# Altium PCB MSP IOboard.PcbDoc
Units mm, origin at the board's own origin, x right, y up, seen from the top; angles counter-clockwise.
Board outline 152.4 x 101.6 mm, 2 copper layers (Top Layer, Bottom Layer); 51 components, 51 nets, 181 pads, 0 vias.
Unrouted connection lines stored in the file: 126.
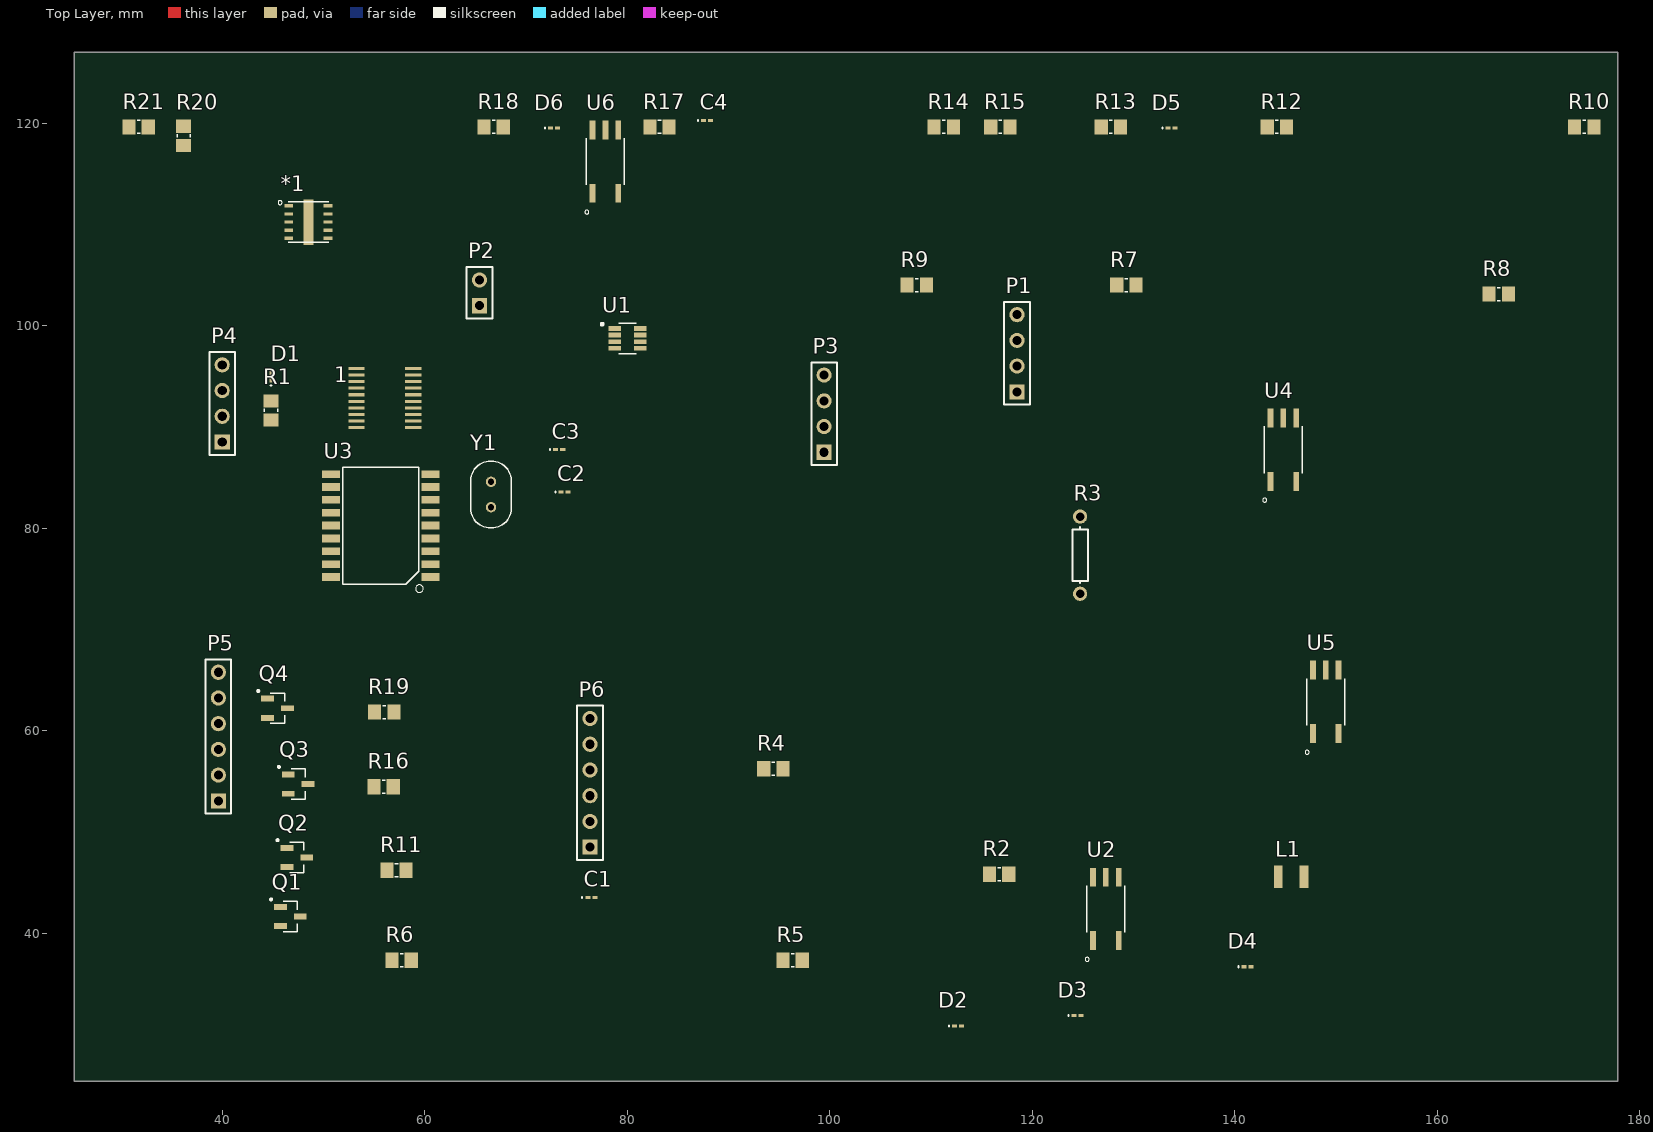
[diagram p0: Top Layer view]
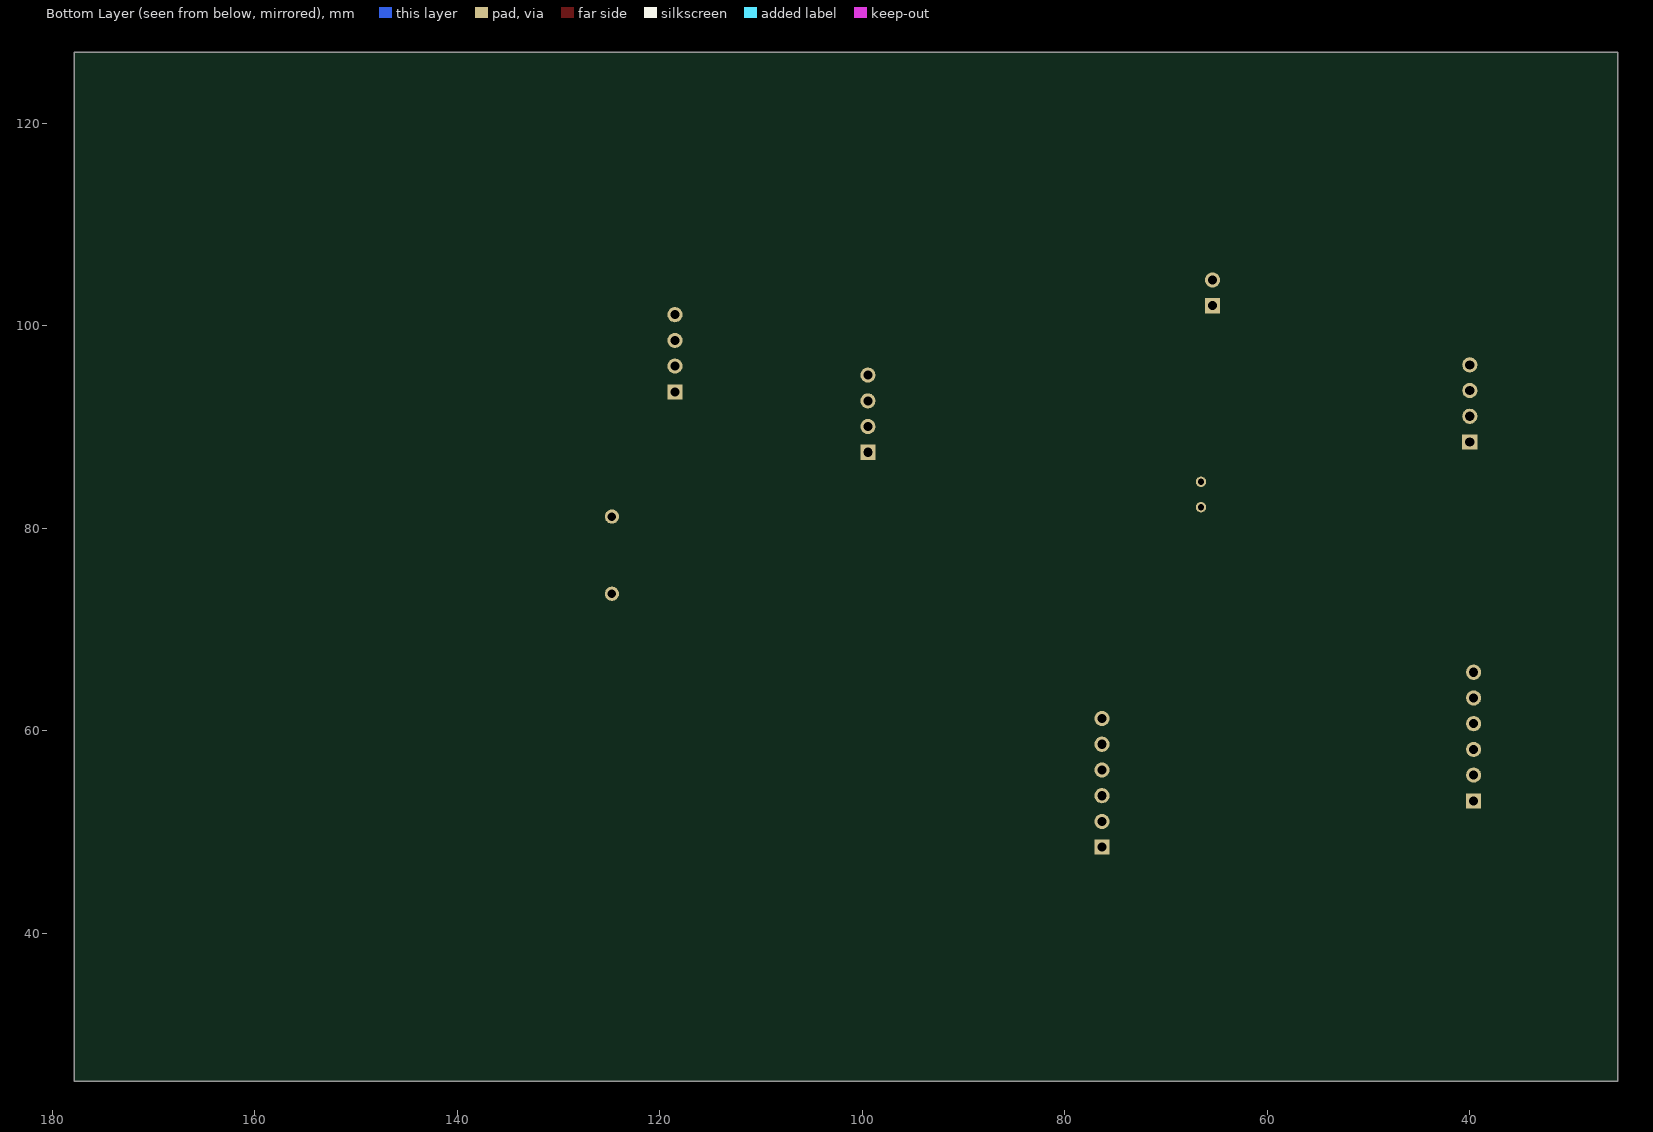
[diagram p1: Bottom Layer view, seen from below]

## Layer stack, top to bottom
Top Solder: solder mask 0.0102, Solder Resist, Dk 3.5
Top Layer: signal copper 0.0356
Dielectric 1: dielectric 0.32, FR-4, Dk 4.8
Bottom Layer: signal copper 0.0356
Bottom Solder: solder mask 0.0102, Solder Resist, Dk 3.5

## Board outline
25.4,25.4 177.8,25.4 177.8,127 25.4,127

## Design rules (kind name [scope] priority, off if disabled: settings)
Clearance [All] p1: gap=0.254 ignorepadtopadclearanceinfootprint=FALSE except(0: Arc-Hole Track-Hole SMDPad-Hole THPad-Hole Via-Hole Fill-Hole Poly-Hole Region-Hole Text-Hole)
PolygonConnect [All] p1: connectstyle=Relief reliefconductorwidth=0.254 reliefentries=4 polygonreliefangle="90 Angle" airgapwidth=0.254
RoutingVias [All] p1: holewidth=0.711 width=1.27 viastyle="Through Hole" minholewidth=0.711 minwidth=1.27 maxholewidth=0.711 maxwidth=1.27
SolderMaskExpansion [All] p1: expansion=0.102
Width [All] p1: maxlimit=0.254 minlimit=0.254 preferedwidth=0.254
30 further rules are at their usual default settings.

## Components (designator, comment, footprint, x,y, rotation, side; value= is the part's Value field where it differs from the comment)
1 "MSP430G2553IPW20" TSSOP-20 56.007,92.964 r0 top
*1 "TPS62177" SON80P400X400X80-10N 48.514,110.236 r0 top
C1 "Cap" 0603 76.454,43.561 r0 top value=22uF
C2 "Cap" 0603 73.818,83.566 r0 top value=22pF
C3 "Cap" 0603 73.279,87.757 r0 top value=22pF
C4 "Cap" 0603 87.884,120.269 r0 top value=2200pF
D1 "LED0" 0603 44.831,94.996 r90 top
D2 "LED0" 0603 112.66,30.861 r0 top
D3 "LED0" 0603 124.46,31.877 r0 top
D4 "LED0" 0603 141.235,36.703 r0 top
D5 "LED0" 0603 133.731,119.507 r0 top
D6 "LED0" 0603 72.771,119.507 r0 top
L1 "Inductor" INDC2520X18N 145.542,45.593 r0 top value=10uH
P1 "Programming Header" HDR1X4 118.491,93.472 r90 top
P2 "Reset Pins" HDR1X2 65.405,101.981 r90 top
P3 "Header 4" HDR1X4 99.441,87.503 r90 top
P4 "Header 4" HDR1X4 40.005,88.519 r90 top
P5 "Header 6" HDR1X6 39.624,53.086 r90 top
P6 "Header 6" HDR1X6 76.327,48.514 r90 top
Q1 "MOSFET-N" SOT95P230X110-3N 46.736,41.656 r0 top
Q2 "MOSFET-N" SOT95P230X110-3N 47.371,47.498 r0 top
Q3 "MOSFET-N" SOT95P230X110-3N 47.498,54.737 r0 top
Q4 "MOSFET-N" SOT95P230X110-3N 45.466,62.23 r0 top
R1 "Res1" RESC2012X70 44.831,91.633 r90 top value=500
R2 "Res1" RESC2012X70 116.713,45.847 r0 top value=500
R3 "Res1" AXIAL-0.3 124.714,77.343 r270 top value=120
R4 "Res1" RESC2012X70 94.427,56.261 r0 top value=100K
R5 "Res1" RESC2012X70 96.332,37.338 r0 top value=500
R6 "Res1" RESC2012X70 57.719,37.338 r180 top value=10k
R7 "Res1" RESC2012X70 129.286,104.013 r0 top value=10k
R8 "Res1" RESC2012X70 166.055,103.124 r0 top value=500
R9 "Res1" RESC2012X70 108.585,104.013 r0 top value=500
R10 "Res1" RESC2012X70 174.498,119.634 r0 top value=500
R11 "Res1" RESC2012X70 57.216,46.228 r180 top value=10k
R12 "Res1" RESC2012X70 144.145,119.634 r0 top value=500
R13 "Res1" RESC2012X70 127.762,119.634 r0 top value=500
R14 "Res1" RESC2012X70 111.252,119.634 r0 top value=47k
R15 "Res1" RESC2012X70 116.84,119.634 r0 top value=100
R16 "Res1" RESC2012X70 55.946,54.483 r180 top value=10k
R17 "Res1" RESC2012X70 83.185,119.634 r0 top value=500
R18 "Res1" RESC2012X70 66.802,119.634 r0 top value=500
R19 "Res1" RESC2012X70 56.007,61.849 r180 top value=10k
R20 "Res1" RESC2012X70 36.195,118.745 r90 top value=100
R21 "Res1" RESC2012X70 31.75,119.634 r0 top value=100
U1 "TCAN332GDCNR" SOT65P280X145-8N 80.025,98.75 r0 top
U2 "TLP152" SOIC127P375X700X220-5N 127.254,42.418 r90 top
U3 "MCP2515T-I/SO(SOIC18)" SOIC18-1.27-11.5X7.5MM 55.664,80.264 r90 top
U4 "TLP152" SOIC127P375X700X220-5N 144.78,87.757 r90 top
U5 "TLP152" SOIC127P375X700X220-5N 148.971,62.865 r90 top
U6 "TLP152" SOIC127P375X700X220-5N 77.851,116.205 r90 top
Y1 "ECS-160-20-46X" XTAL_ECS-160-20-46X 66.548,83.332 r90 top

## Footprints (in the part's own frame and the unit in brackets; to place one, negate y for a bottom-side part, rotate by r counter-clockwise, add the part's x,y. Pads: shape width x height; smd on the part's side, far side on the other; paste and mask are expansions set on the pad)
0603 [mm] "Chip Inductor, Body 0.6x0.3mm, IPC High Density"
  rect 0.5x0.3 smd: 1(-0.35,0) 2(0.35,0)
  silkscreen extent -0.9,-0.05 -0.9,0.05, body extent -0.33,-0.18 0.33,0.18, height 0.55
AXIAL-0.3 [mm] "Axial Device, Thru-Hole; 2 Leads; 0.3 in Pin Spacing"
  round 1.4 hole 0.85: 1(-3.81,0) 2(3.81,0)
  silkscreen extent -2.77,-0.76 2.77,0.76
HDR1X2 [mm] "Connector; Header; 2 Position"
  rect 1.5x1.5 hole 0.9: 1(0,0)
  round 1.5 hole 0.9: 2(2.54,0)
  silkscreen extent -1.27,-1.27 3.81,1.27
HDR1X4 [mm] "Connector; Header; 4 Position"
  rect 1.5x1.5 hole 0.9: 1(0,0)
  round 1.5 hole 0.9: 2(2.54,0) 3(5.08,0) 4(7.62,0)
  silkscreen extent -1.27,-1.27 8.89,1.27
HDR1X6 [mm] "Connector; Header; 6 Position"
  rect 1.5x1.5 hole 0.9: 1(0,0)
  round 1.5 hole 0.9: 2(2.54,0) 3(5.08,0) 4(7.62,0) 5(10.16,0) 6(12.7,0)
  silkscreen extent -1.27,-1.27 13.97,1.27
INDC2520X18N [mil]
  rect 34x87 smd: 1(-50,0) 2(50,0)
RESC2012X70 [mm]
  rect 1.3x1.5 smd: 1(-0.95,0) 2(0.95,0)
  silkscreen extent -0.15,-0.65 0.15,0.65
SOIC18-1.27-11.5X7.5MM [mil]
  rect 30x70 smd: 1(-200,-193.5) 2(-150,-193.5) 3(-100,-193.5) 4(-50,-193.5) 5(0,-193.5) 6(50,-193.5) 7(100,-193.5) 8(150,-193.5) 9(200,-193.5) 10(200,193.5) 11(150,193.5) 12(100,193.5) 13(50,193.5) 14(0,193.5) 15(-50,193.5) 16(-100,193.5) 17(-150,193.5) 18(-200,193.5)
  silkscreen extent -260,-165 227,148
SOIC127P375X700X220-5N [mm]
  rect 1.85x0.57 smd: 1(-3.13,1.27) 3(-3.13,-1.27) 4(3.13,-1.27) 5(3.13,0) 6(3.13,1.27)
  silkscreen extent -5.18,-1.88 2.3,2.04
SON80P400X400X80-10N [mm]
  rect 0.86x0.32 smd: 1(-1.935,1.6) 2(-1.935,0.8) 3(-1.935,0) 4(-1.935,-0.8) 5(-1.935,-1.6) 6(1.935,-1.6) 7(1.935,-0.8) 8(1.935,0) 9(1.935,0.8) 10(1.935,1.6)
  rect 1x4.5 smd: 11(0,0)
  silkscreen extent -2.99,-2 2,2.12
SOT65P280X145-8N [mm]
  rect 1.21x0.48 smd: 1(-1.255,0.975) 2(-1.255,0.325) 3(-1.255,-0.325) 4(-1.255,-0.975) 5(1.255,-0.975) 6(1.255,-0.325) 7(1.255,0.325) 8(1.255,0.975)
  silkscreen extent -2.62,-1.5 0.88,1.52
SOT95P230X110-3N [mm]
  rect 1.26x0.59 smd: 1(-0.98,0.95) 2(-0.98,-0.95) 3(0.98,0)
  silkscreen extent -2,-1.5 0.7,1.8
TSSOP-20 [mm]
  rect 1.6x0.3 smd: 1(-2.748,2.822) 2(-2.748,2.172) 3(-2.748,1.522) 4(-2.748,0.872) 5(-2.748,0.222) 6(-2.748,-0.428) 7(-2.748,-1.078) 8(-2.748,-1.728) 9(-2.748,-2.378) 10(-2.748,-3.028) 11(2.852,-3.028) 12(2.852,-2.378) 13(2.852,-1.728) 14(2.852,-1.078) 15(2.852,-0.428) 16(2.852,0.222) 17(2.852,0.872) 18(2.852,1.522) 19(2.852,2.172) 20(2.852,2.822)
XTAL_ECS-160-20-46X [mm]
  round 1.03 hole 0.63: 1(-1.25,0) 2(1.25,0)
  silkscreen extent -3.3,-2 3.3,2

## Part data
1: "MSP430G2x53, MSP430G2x13 Mixed Signal Microcontroller 20-TSSOP -40 to 85", Package="TSSOP-20 Texas Instruments", Availability=Unavailable, MF="Texas Instruments", MP=MSP430G2553IPW20, Price=None, SnapEDA_Link=https://www.snapeda.com/parts/MSP430G2553IPW20/Texas%20Instruments/view-part/?ref=snap
C1 C2 C3 C4: "Capacitor", LatestRevisionDate=17-Jul-2002, LatestRevisionNote="Re-released for DXP Platform.", PackageDescription="Radial Cap, Thru-Hole; 2 Leads; 0.3 in Pin Spacing", PackageReference=RAD-0.3, Published=8-Jun-2000, Publisher="Altium Limited"
D1 D2 D3 D4 D5 D6: "Typical INFRARED GaAs LED", LatestRevisionDate=08-Jul-2005, LatestRevisionNote="Mech Layer 1 removed.", PackageDescription="LED; 2 Leads", PackageReference=LED-0, Published=8-Jun-2000, Publisher="Altium Limited"
P1: library part "Header 4", "Header, 4-Pin", LatestRevisionDate=17-Jul-2002, LatestRevisionNote="Re-released for DXP Platform.", Publisher="Altium Limited"
P2: library part "Header 2", "Header, 2-Pin", LatestRevisionDate=17-Jul-2002, LatestRevisionNote="Re-released for DXP Platform.", Publisher="Altium Limited"
P3 P4: "Header, 4-Pin", LatestRevisionDate=17-Jul-2002, LatestRevisionNote="Re-released for DXP Platform.", Publisher="Altium Limited"
P5 P6: "Header, 6-Pin", LatestRevisionDate=17-Jul-2002, LatestRevisionNote="Re-released for DXP Platform.", Publisher="Altium Limited"
Q1 Q2 Q3 Q4: "N-Channel MOSFET", LatestRevisionDate=17-Jul-2002, LatestRevisionNote="Re-released for DXP Platform.", PackageDescription="TO, Flat Index; 3 In-Line, Axial Leads; Body Dia. 4.6mm; Lead Dia. 0.5 mm (max)", PackageReference=E3, PackageVersion=1995/1996, Published=8-Jun-2000, Publisher="Altium Limited"
R1 R2 R3 R4 R5 R6 R7 R8 R9 R10 R11 R12 R13 R14 R15 R16 R17 R18 R19 R20 R21: "Resistor", LatestRevisionDate=17-Jul-2002, LatestRevisionNote="Re-released for DXP Platform.", PackageDescription="Axial Device, Thru-Hole; 2 Leads; 0.3 in Pin Spacing", PackageReference=AXIAL-0.3, Published=8-Jun-2000, Publisher="Altium Limited"
U1: "3.3-V CAN Transceivers with CAN FD _Flexible Data Rate_ 8-SOT-23 -40 to 125", Package="SOT-23 Texas Instruments", Availability=Unavailable, MF="Texas Instruments", MP=TCAN332GDCNR, Price=None, SnapEDA_Link=https://www.snapeda.com/parts/TCAN332GDCNR/Texas%20Instruments/view-part/?ref=snap
U2 U4 U5 U6: "Optocoupler, Gate Driver, 3.75kv, Smdip", Package="SOIC-5 Toshiba", Availability=Unavailable, MF=Toshiba, MP=TLP152, Price=None, SnapEDA_Link=https://www.snapeda.com/parts/TLP152/Toshiba/view-part/?ref=snap
U3: library part INTERFACE-MCP2515T-I/SO(SOIC18), "MCP2515 Series 5.5 V 1 Mb/s Stand Alone SPI Interface CAN Controller- SOIC-18", Package="SOIC-18 Microchip", Availability=Unavailable, MF=Microchip, MP=MCP2515T-I/SO, Price=None, SnapEDA_Link=https://www.snapeda.com/parts/MCP2515T-I/SO/Microchip/view-part/?ref=snap
Y1: "Crystal 16MHz ±30ppm _Tol_ ±50ppm _Stability_ 20pF FUND 50Ohm", Package="HC46/X ECS International", Availability=Unavailable, MF="ECS Inc.", MP=ECS-160-20-46X, Price=None, SnapEDA_Link=https://www.snapeda.com/parts/ECS-160-20-46X/ECS%20Inc./view-part/?ref=snap
L1: Code_IEC=1005, Code_JEITA=0402, LatestRevisionDate=29-May-2009, LatestRevisionNote="IPC-7351 Footprint Added.", PackageDescription="Chip Inductor", PackageReference=0402-A, Published=8-Jun-2000, Publisher="Altium Limited"

## Nets (pads, with @x,y where several pads share a name; then routed paths per layer and width w, separated by ;. In a path a pad name is that pad's centre, name@x,y a point inside that pad or via, vN(x,y) a via of type N, cw(c..) or ccw(c..) an arc to the next point about the centre after c; other vN are vias at no path point)
3V3: 1.1 *1.3 *1.7 C1.2 D2.1 L1.2 P1.4 P6.5 P6.6 R4.1 R7.2 R14.1 U1.3 U3.18
4.75-28V: *1.1 *1.2 P3.4 P4.4 P5.6 Q1.3 Q2.3 Q3.3 Q4.3 U2.6 U4.6 U5.6 U6.6
CANH: P3.1 P4.1 R3.2 U1.7
CANL: P3.2 P4.2 R3.1 U1.6
FET1: 1.9 R1.1 R2.2 R17.2 R18.1
FET2: 1.10 R8.1 R9.1
FET3: 1.11 R12.2 R13.1
FET4: 1.12
GND: 1.20 *1.4 *1.5 *1.9 *1.10 C1.1 C2.1 C3.1 C4.1 D1.2 D3.2 D4.2 D5.2 D6.2 P1.1 P2.2 P3.3 P4.3 P5.5 P6.3 P6.4 R5.2 R6.1 R11.1 R16.1 R19.1 U1.2 U2.3 U2.4 U3.9 U4.3 U4.4 U5.3 U5.4 U6.3 U6.4
MCP_CS: 1.13 U3.16
MCP_INT: 1.6 R10.2 U3.12
MCP_MISO: 1.14 U3.15
MCP_MOSI: 1.15 U3.14
MCP_RX0: 1.5 U3.11
MCP_RX1: 1.2 U3.10
MCP_SCLK: 1.7 U3.13
MCP_TX0: 1.8 U3.4
MCP_TX1: 1.18 U3.5
MCP_TX2: 1.19 U3.6
Net*1_6: *1.6 L1.1
Net*1_8: *1.8 R4.2
NetC2_2: C2.2 U3.7 Y1.1
NetC3_2: C3.2 U3.8 Y1.2
NetC4_2: C4.2 P2.1 R15.2
NetD1_1: D1.1 R1.2
NetD2_2: D2.2 R5.1
NetD3_1: D3.1 R8.2
NetD4_1: D4.1 R10.1
NetD5_1: D5.1 R12.1
NetD6_1: D6.1 R17.1
NetP6_1: P6.1 R21.2
NetP6_2: P6.2 R20.2
NetQ1_2: Q1.2 R6.2 U2.5
NetQ2_2: Q2.2 R11.2 U4.5
NetQ3_2: Q3.2 R16.2 U5.5
NetQ4_2: Q4.2 R19.2 U6.5
NetR2_1: R2.1 U2.1
NetR7_1: R7.1 U3.17
NetR9_2: R9.2 U4.1
NetR13_2: R13.2 U5.1
NetR18_2: R18.2 U6.1
NetU1_1: U1.1 U3.1
NetU1_4: U1.4 U3.2
P1.1: 1.3 R21.1
P1.2: 1.4 R20.1
PWROUT1: P5.1 Q1.1
PWROUT2: P5.2 Q2.1
PWROUT3: P5.3 Q3.1
PWROUT4: P5.4 Q4.1
RST: 1.16 P1.2 R14.2 R15.1
TEST: 1.17 P1.3
pads on no net: *1.11 U1.5 U1.8 U3.3